# Altium PCB DTTT_PCB.PcbDoc
Units mil, origin at the board's own origin, x right, y up, seen from the top; angles counter-clockwise.
Board outline 4150.03 x 2075.03 mil, 2 copper layers (Top Layer, Bottom Layer); 26 components, 16 nets, 61 pads, 5 vias.
Unrouted connection lines stored in the file: 1.
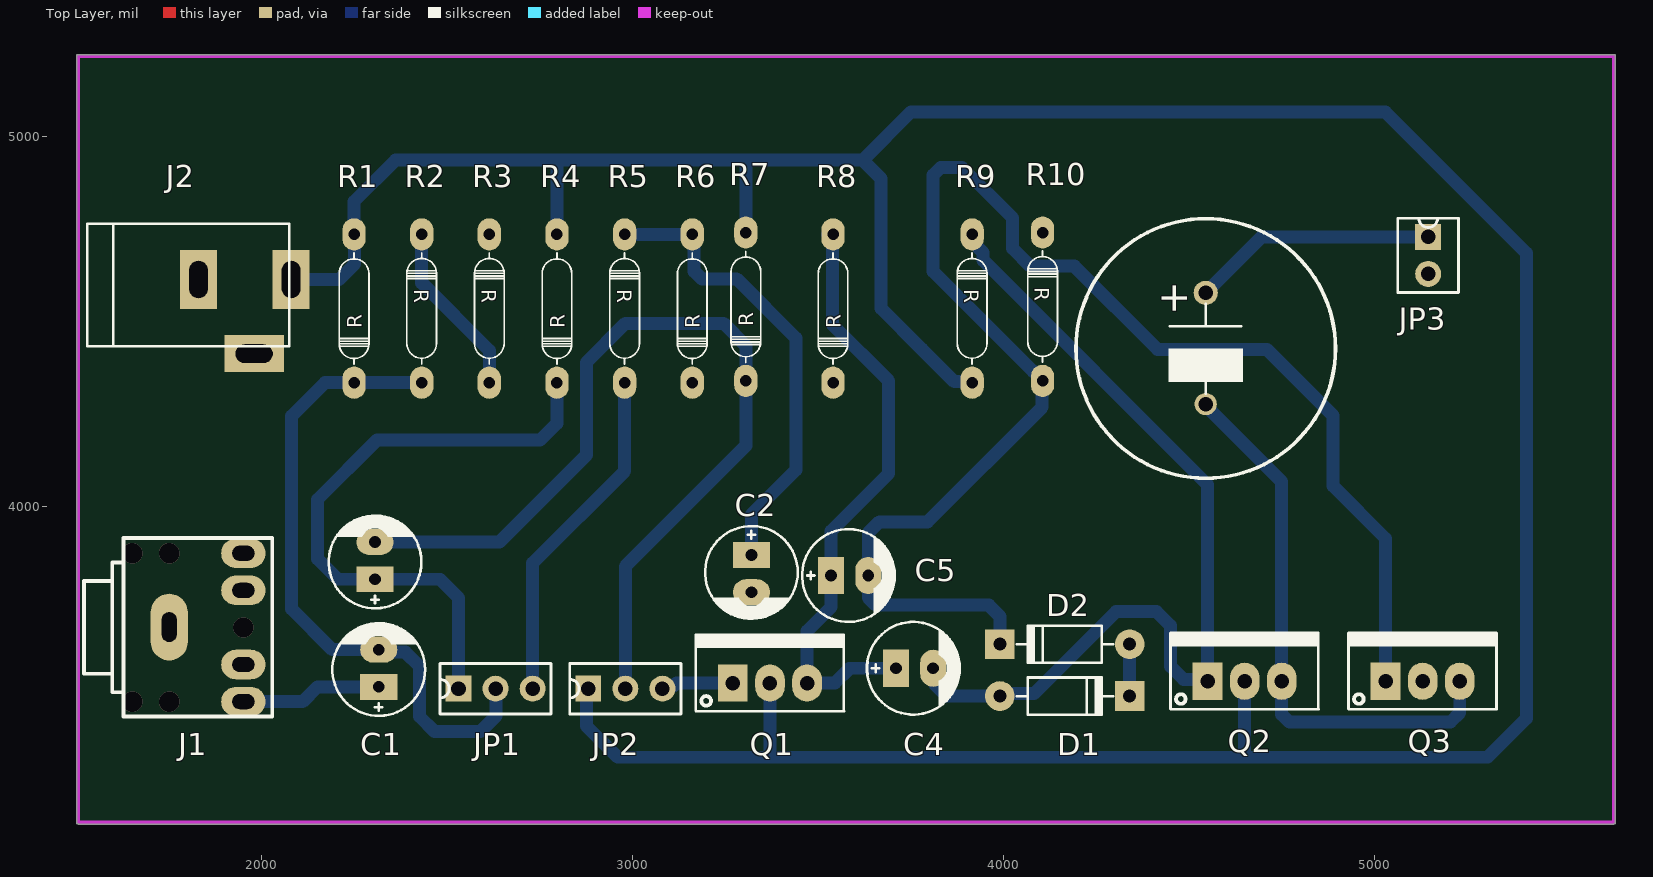
[diagram p0: Top Layer view]
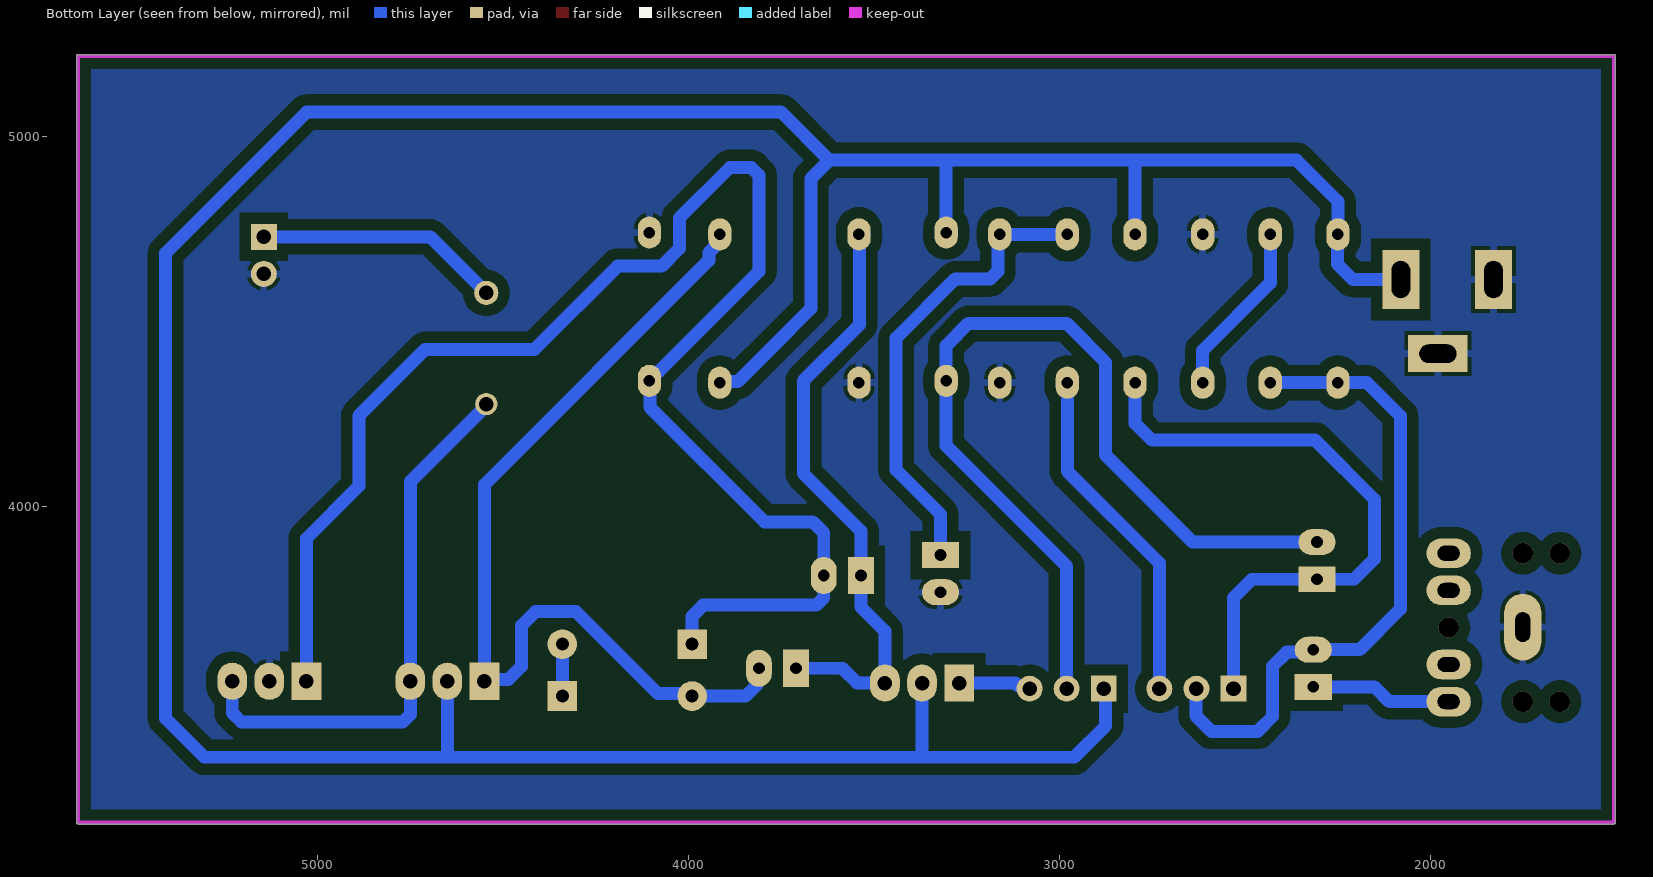
[diagram p1: Bottom Layer view, seen from below]
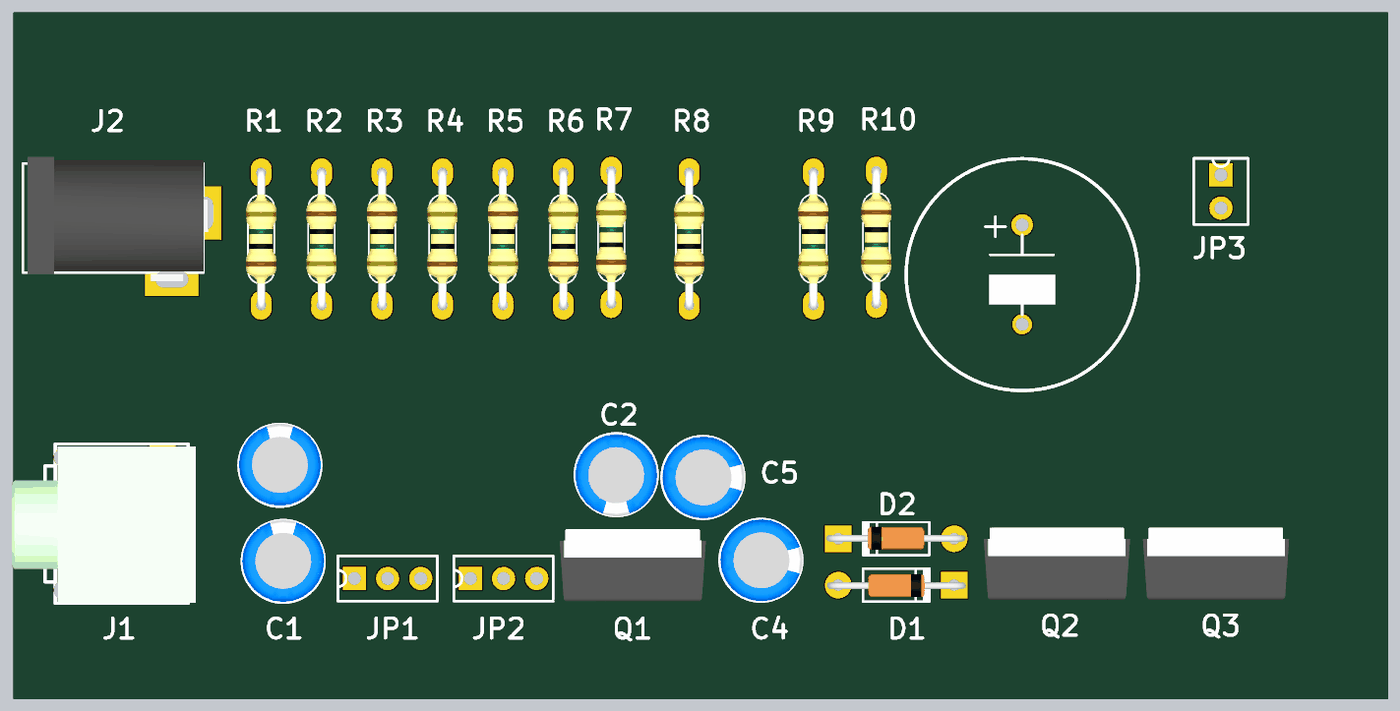
[diagram p2: 3D render of the assembled board from above, using the file's embedded part models]

## Layer stack, top to bottom
Top Solder: solder mask 0.4, Solder Resist, Dk 3.5
Top Layer: signal copper 1.4
Dielectric 1: dielectric 12.6, FR-4, Dk 4.8
Bottom Layer: signal copper 1.4
Bottom Solder: solder mask 0.4, Solder Resist, Dk 3.5

## Board outline
1505,3144.99 cw(c1505,3150) 1499.98,3150 1499.98,5215 cw(c1505,5215) 1505,5220.01 5645,5220.02 cw(c5645,5215) 5650.01,5215 5650.02,3150 cw(c5645,3150) 5645,3144.99

## Design rules (kind name [scope] priority, off if disabled: settings)
Clearance [All] p1: gap=30 ignorepadtopadclearanceinfootprint=FALSE
PolygonConnect [All] p1: connectstyle=Relief reliefconductorwidth=20 reliefentries=4 polygonreliefangle="90 Angle" airgapwidth=10
RoutingVias [All] p1: holewidth=28 width=50 viastyle="Through Hole" minholewidth=28 minwidth=50 maxholewidth=28 maxwidth=50
SolderMaskExpansion [All] p1: expansion=4 istentingtop=FALSE
Width [All] p1: maxlimit=35 minlimit=25 preferedwidth=35
30 further rules are at their usual default settings.

## Components (designator, comment, footprint, x,y, rotation, side; value= is the part's Value field where it differs from the comment)
C1 "100uF" CP1/2.5 2315,3515 r90 top value="47uF/16 - 50V"
C2 "100uF" CP1/2.5 3320,3870 r270 top value="47uF/16 - 50V"
C3 "100uF" CP1/2.5 2305,3805 r90 top value="47uF/16 - 50V"
C4 "100uF" CP1/2.5 3710,3565 r0 top value="47uF/16 - 50V"
C5 "100uF" CP1/2.5 3535,3815 r0 top value="47uF/16 - 50V"
C6 "1000uF" CAP1000uF50V 4545,4427.31 r90 top
D1 "1N4007" D1A 3990,3490 r180 top
D2 "1N4007" D1A 4340,3630 r0 top
J1 "Jac Phone2" JacPhone2 1850,3675 r90 top
J2 "JACK DC 5MM" "JACK DC 5MM" 1730.9,4608.19 r0 top
JP1 "BC547" CON3 2530,3510 r90 top value="Connector 3"
JP2 "BC547" CON3 2880,3510 r90 top value="Connector 3"
JP3 "JP2" CON2 5145,4728.37 r0 top value="Connector 2"
Q1 "TIP41C" QTO-220 3270,3525 r0 top
Q2 "TIP41C" QTO-220 4550,3530 r0 top
Q3 "TIP42C" QTO-220 5030,3530 r0 top
R1 "91k" "DIEN TRO 1/4 W" 2248.4,4335 r90 top value="R1/4W - 1K"
R2 "20k" "DIEN TRO 1/4 W" 2430.79,4735 r270 top value="R1/4W - 1K"
R3 "1k" "DIEN TRO 1/4 W" 2613.19,4735 r270 top value="R1/4W - 1K"
R4 "4.7k" "DIEN TRO 1/4 W" 2795.6,4335 r90 top value="R1/4W - 1K"
R5 "91" "DIEN TRO 1/4 W" 2977.99,4735 r270 top value="R1/4W - 1K"
R6 "1.2k" "DIEN TRO 1/4 W" 3160.4,4335 r90 top value="R1/4W - 1K"
R7 "330k" "DIEN TRO 1/4 W" 3305,4340 r90 top value="R1/4W - 1K"
R8 "57" "DIEN TRO 1/4 W" 3540,4335 r90 top value="R1/4W - 1K"
R9 "560" "DIEN TRO 1/4 W" 3915,4735 r270 top value="R1/4W - 1K"
R10 "560" "DIEN TRO 1/4 W" 4105,4740 r270 top value="R1/4W - 1K"

## Footprints (in the part's own frame and the unit in brackets; to place one, negate y for a bottom-side part, rotate by r counter-clockwise, add the part's x,y. Pads: shape width x height; smd on the part's side, far side on the other; paste and mask are expansions set on the pad)
CAP1000uF50V [mil] "Tu hoa 4700uF/25V"
  round 65 hole 39.37: 1(150,0)
  round 60 hole 39.37: 2(-150,0)
  silkscreen extent -350,-350 350,350
CON2 [mil]
  rect 70x70 hole 39.37 unplated: 1(0,0)
  round 70 hole 39.37 unplated: 2(0,-100)
  silkscreen extent -82,-150 82,50
CON3 [mil]
  rect 70x70 hole 39.37 unplated: 1(0,0)
  round 70 hole 39.37 unplated: 2(0,-100) 3(0,-200)
  silkscreen extent -68,-250 68,50
CP1/2.5 [mil] "Tu hoa 33 >100 uF,50V, 220uF/16V,25V"
  rect 70x100 hole 32: 1(0,0)
  oval 70x100 hole 32: 2(100,0)
  silkscreen extent -78,-125 172,125, body extent -76,-124 172,124, height 422
D1A [mil] "Diode 1A, W 100mil, L 350mil"
  round 80 hole 35: 1(0,0)
  rect 80x80 hole 35: 2(-350,0)
  silkscreen extent -305,-50 -45,50, body extent -386,-33 34,36, height 84
"DIEN TRO 1/4 W" [mm]
  oval 2.2x1.6 hole 0.787: 1(0,0) 2(10.16,0)
  silkscreen extent 1.26,-1.02 8.88,1.02, body extent -0.3,-1.16 10.46,1.16, height 2.93
"JACK DC 5MM" [mil]
  rect 100x160 hole 50 slot 100 at 90 deg: 1(348,5) 2(98,5)
  rect 160x100 hole 50 slot 100 at 0 deg: 3(248,-195)
  silkscreen extent -202,-175 343,155, body extent -187,-200 357,174, height 434
JacPhone2 [mil] "Jac Phone Stereo"
  oval 80x120 hole 40 slot 60 at 90 deg: 1(-200,-100) 2(-100,-100) 3(100,-100) 4(200,-100)
  oval 180x100 hole 40 slot 80 at 0 deg: 5(1,100)
  silkscreen extent -240,-178 241,330, body extent -239,-202 233,354, height 394
QTO-220 [mil] "TO-220 - 1-2-3"
  rect 80x100 hole 39: 1(0,0)
  oval 80x100 hole 39: 2(100,0) 3(200,0)
  silkscreen extent -100,-76 300,130, body extent -121,-85 321,100, height 755

## Part data
C1 C2 C3 C4 C5: library part CP2, "C 47uF/50V , 220uF/16V", Description 1="470uF/6,3V - 330uF/10V - 220uF/16V", Description 2="100uF/25V - 35V - 47uF/50V - 22uF/100V", Description 3="33uF => 47uF/63V - 1uF => 4,7uF/160V", Description 4="1uF => 2,2uF/250V - 1uF/350V"
C6: library part Cap1000uF50V, 1000uF=1000uF
D1 D2: library part D1A, "Diode 1A"
J1: "Jac Phone Stereo", Creat by=VanDungEvn@Gmail.com
JP1 JP2: library part Con3, "Connector 3"
JP3: library part CON2, "Connector 2"
Q1 Q2: "NPN 2W, BCE"
Q3: "PNP 2W, BCE"
R1 R2 R3 R4 R5 R6 R7 R8 R9 R10: library part Res, "Resistor 1/4W"

## Via types
v1: diameter 55, hole 55, Top Layer to Bottom Layer, 5 vias

## Nets (pads, with @x,y where several pads share a name; then routed paths per layer and width w, separated by ;. In a path a pad name is that pad's centre, name@x,y a point inside that pad or via, vN(x,y) a via of type N, cw(c..) or ccw(c..) an arc to the next point about the centre after c; other vN are vias at no path point)
GND: C2.2 J1.5 J2.2 J2.3 JP3.2 Q3.2 R3.1 R6.1 R8.1 R10.1
NetC1_1: C1.1 J1.1 | length 381.6
  Bottom Layer w35: J1.1 2110,3475 2150,3515 C1.1
  other v1: 1750,3475
NetC1_2: C1.2 JP1.2 R1.1 R2.2 | length 1765.9
  Bottom Layer w35: R2.2 R1.1 2170,4335 2080,4245 2080,3725 2190,3615 C1.2 2321.7,3608.3 2386.7,3608.3 2425,3570 2425,3435 2465,3395 2590,3395 2630.62,3435.62 2630.62,3509.38 JP1.2
NetC2_1: C2.1 R5.1 R6.2 | length 1267.8
  Bottom Layer w35: R5.1 R6.2 3165.76,4729.64 3165.76,4635.5 3186.26,4615 3280,4615 3440,4455 3440,4100 3320,3980 C2.1
NetC3_1: C3.1 JP1.1 R4.1 | length 1667.2
  Bottom Layer w35: JP1.1@2515,3525 2527.5,3525 2530,3527.5 2530,3755 2480,3805 C3.1 2205,3805 2150,3860 2150,4020 2310,4180 2750,4180 2795.6,4225.6 R4.1
NetC3_2: C3.2 JP2.2 R7.1 | length 2475.3
  Bottom Layer w35: C3.2 2640,3905 2874.6,4139.6 2874.6,4389.6 2980,4495 3245,4495 3305,4435 3305,4165 2980,3840 JP2.2
NetC4_1: C4.1 C5.1 Q1.3 R8.2 | length 1627.6
  Bottom Layer w35: R8.2@3525.21,4735 R8.2@3530,4730.21 ; R8.2 3538.75,4733.75 3538.75,4491.25 3690,4340 3690,4090 3535,3935 C5.1 3535,3730 3470,3665 Q1.3 3545,3525 3585,3565 C4.1
NetC4_2: C4.2 D1.1 Q2.1 R9.1 | length 2498.6
  Bottom Layer w35: C4.2 3815,3560 3815,3520.5 3845.5,3490 D1.1 3997.04,3497.04 4082.5,3497.04 4302.96,3717.5 4412.5,3717.5 4450,3680 4450,3570 4485,3535 4545,3535 Q2.1 4550,4060 3945,4665 3945,4685.61 3915,4715.61 R9.1
NetC5_2: C5.2 D2.2 Q3.1 R10.2 | length 4178
  Bottom Layer w35: D2.2 3990,3705 3960,3735 3655.5,3735 3635,3755.5 C5.2 3635,3930 3665,3960 3795,3960 4104.05,4269.05 R10.2@4104.05,4345.19 ; R10.2 4105,4344.24 4083.43,4365.81 4079.19,4365.81 3810,4635 3810,4895 3830.5,4915.5 3888.03,4915.5 4024,4779.53 4024,4697.48 4072.28,4649.19 4190.81,4649.19 4415,4425 4710,4425 4888.75,4246.25 4888.75,4056.25 5030,3915 Q3.1
NetC6_1: C6.1 JP3.1 | length 662.6
  Bottom Layer w35: C6.1 4696.06,4728.37 JP3.1
NetC6_2: C6.2 Q2.3 Q3.3 | length 1505.6
  Bottom Layer w35: C6.2 4545,4273.08 4750,4068.08 Q2.3 4750,3440.5 4770.5,3420 5205,3420 5230,3445 Q3.3
NetD1_2: D1.2 D2.1 | length 140
  Bottom Layer w35: D1.2 D2.1
NetJP1_3: JP1.3 R5.2 | length 927.7
  Bottom Layer w35: JP1.3 2730,3848.63 2977.99,4096.63 R5.2
NetJP2_3: JP2.3 Q1.1 | length 196.2
  Bottom Layer w35: JP2.3 3086.7,3516.7 3109.7,3516.7 3118,3525 Q1.1
NetR2_1: R2.1 R3.2 | length 475.6
  Bottom Layer w35: R2.1 2430.79,4604.21 2613.19,4421.81 R3.2
VCC: J2.1 JP2.1 Q1.2 Q2.2 R1.2 R4.2 R7.2 R9.2 | length 9327.6
  Bottom Layer w35: J2.1 2208.19,4613.19 2250,4655 2250,4733.4 R1.2 2248.4,4823.4 2360,4935 2790,4935 ; R4.2 2795.6,4929.4 2790,4935 ; JP2.1 2875,3505 2875,3409.5 2959.5,3325 3370,3325 ; R7.2@3305,4722.7 3305,4935 ; Q1.2 3370,3325 ; R9.2@3925,4335 3922.2,4337.8 3867.2,4337.8 3779.64,4425.36 3670,4535 3670,4885 3620,4935 ; Q2.2 4650,3330 4655,3325 ; 2790,4935 3305,4935 ; 3305,4935 3620,4935 ; 3370,3325 4655,3325 ; 3620,4935 3750,5065 5029.5,5065 5410,4684.5 5410,3430 5305,3325 4655,3325
pads on no net: J1.2 J1.3 J1.4
copper on no net:
  other v1: 1650,3475 1950,3675 1650,3875 1750,3875

## Polygon pours and split planes (outlines as drawn)
GND on Bottom Layer "GND_L02_P000" (solid, remove dead copper, pour order 0): 1505,5215 1505,3150 5645,3150 5645,5215

## Keep-outs
Keep-Out Layer:
  lines w10: 1505,3150 5645,3150 5645,5215 1505,5215 1505,3150

## Text inside footprints (layer, text, board x,y; h text height)
C6: Top Overlay "+" at 4495,4517.31 h80 r90
R1: Top Overlay "R" at 2268.9,4482.5 h39.37 r90
R2: Top Overlay "R" at 2410.29,4587.5 h39.37 r270
R3: Top Overlay "R" at 2592.69,4587.5 h39.37 r270
R4: Top Overlay "R" at 2816.1,4482.5 h39.37 r90
R5: Top Overlay "R" at 2957.49,4587.5 h39.37 r270
R6: Top Overlay "R" at 3180.9,4482.5 h39.37 r90
R7: Top Overlay "R" at 3325.5,4487.5 h39.37 r90
R8: Top Overlay "R" at 3560.5,4482.5 h39.37 r90
R9: Top Overlay "R" at 3894.5,4587.5 h39.37 r270
R10: Top Overlay "R" at 4084.5,4592.5 h39.37 r270